# Altium PCB PCB_Design.PcbDoc
Units mil, origin at the board's own origin, x right, y up, seen from the top; angles counter-clockwise.
Board outline 2007.87 x 905.51 mil, 6 copper layers (Top Layer, Signal Layer 4, Signal Layer 3, Signal Layer 1, Signal Layer 2, Bottom Layer), stack 20.356 mil thick; 143 components, 153 nets, 827 pads, 0 vias.
Unrouted connection lines stored in the file: 8.
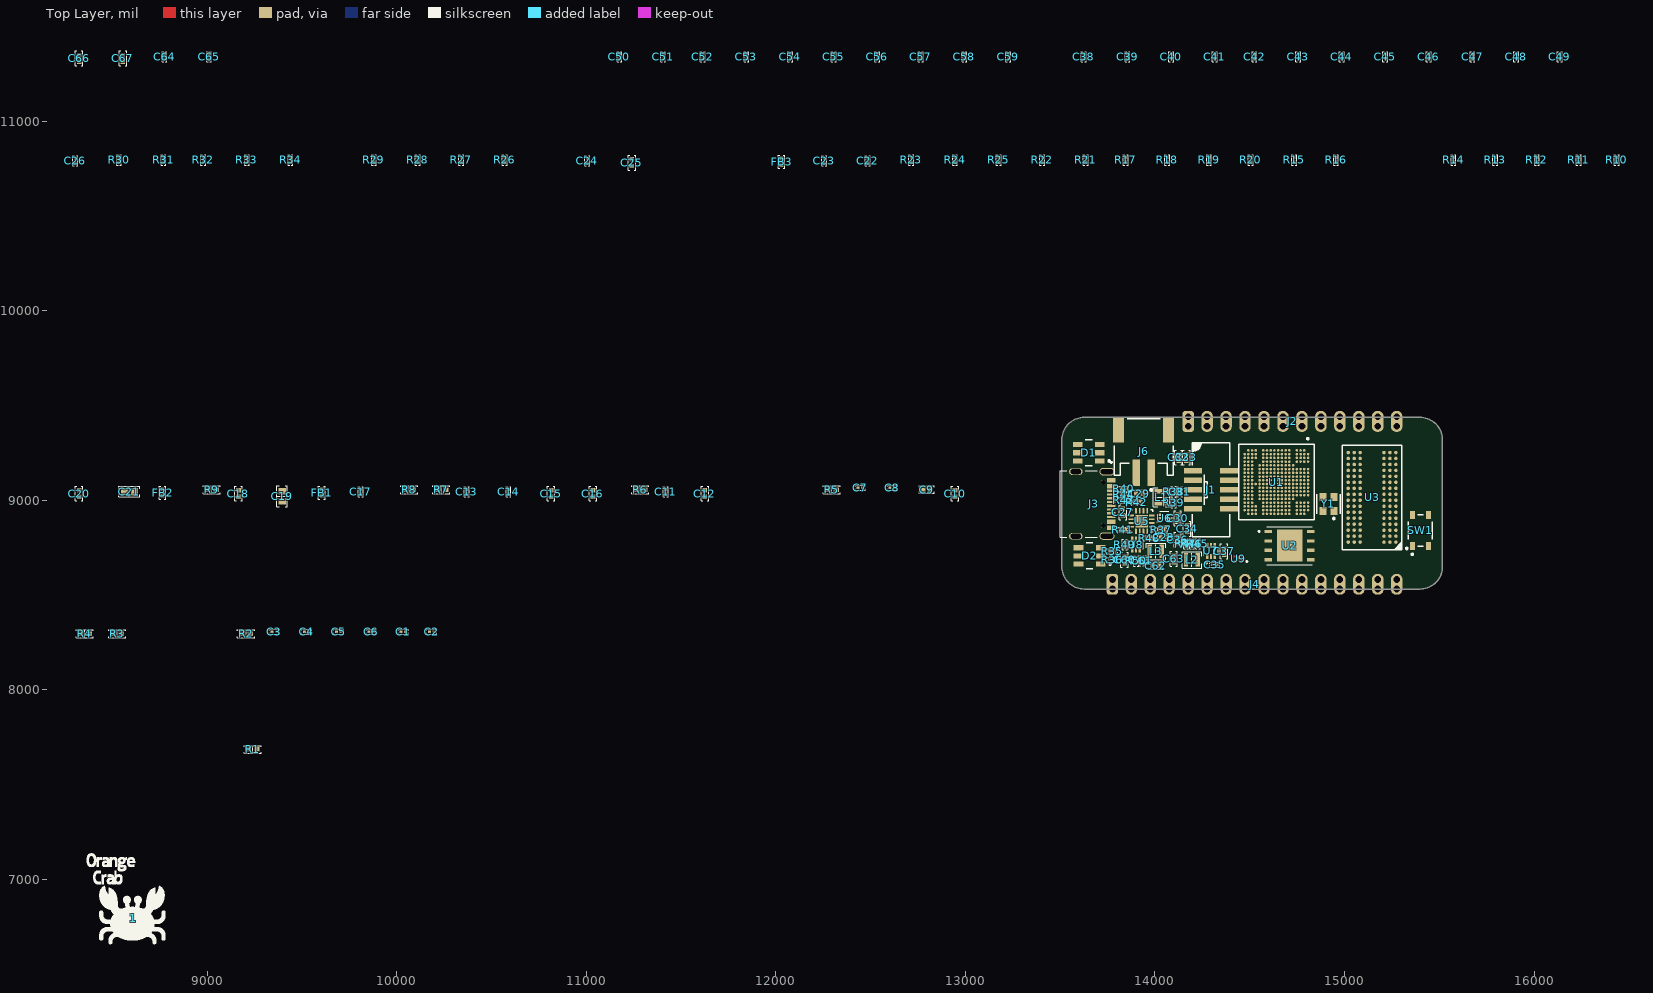
[diagram p0: Top Layer view]
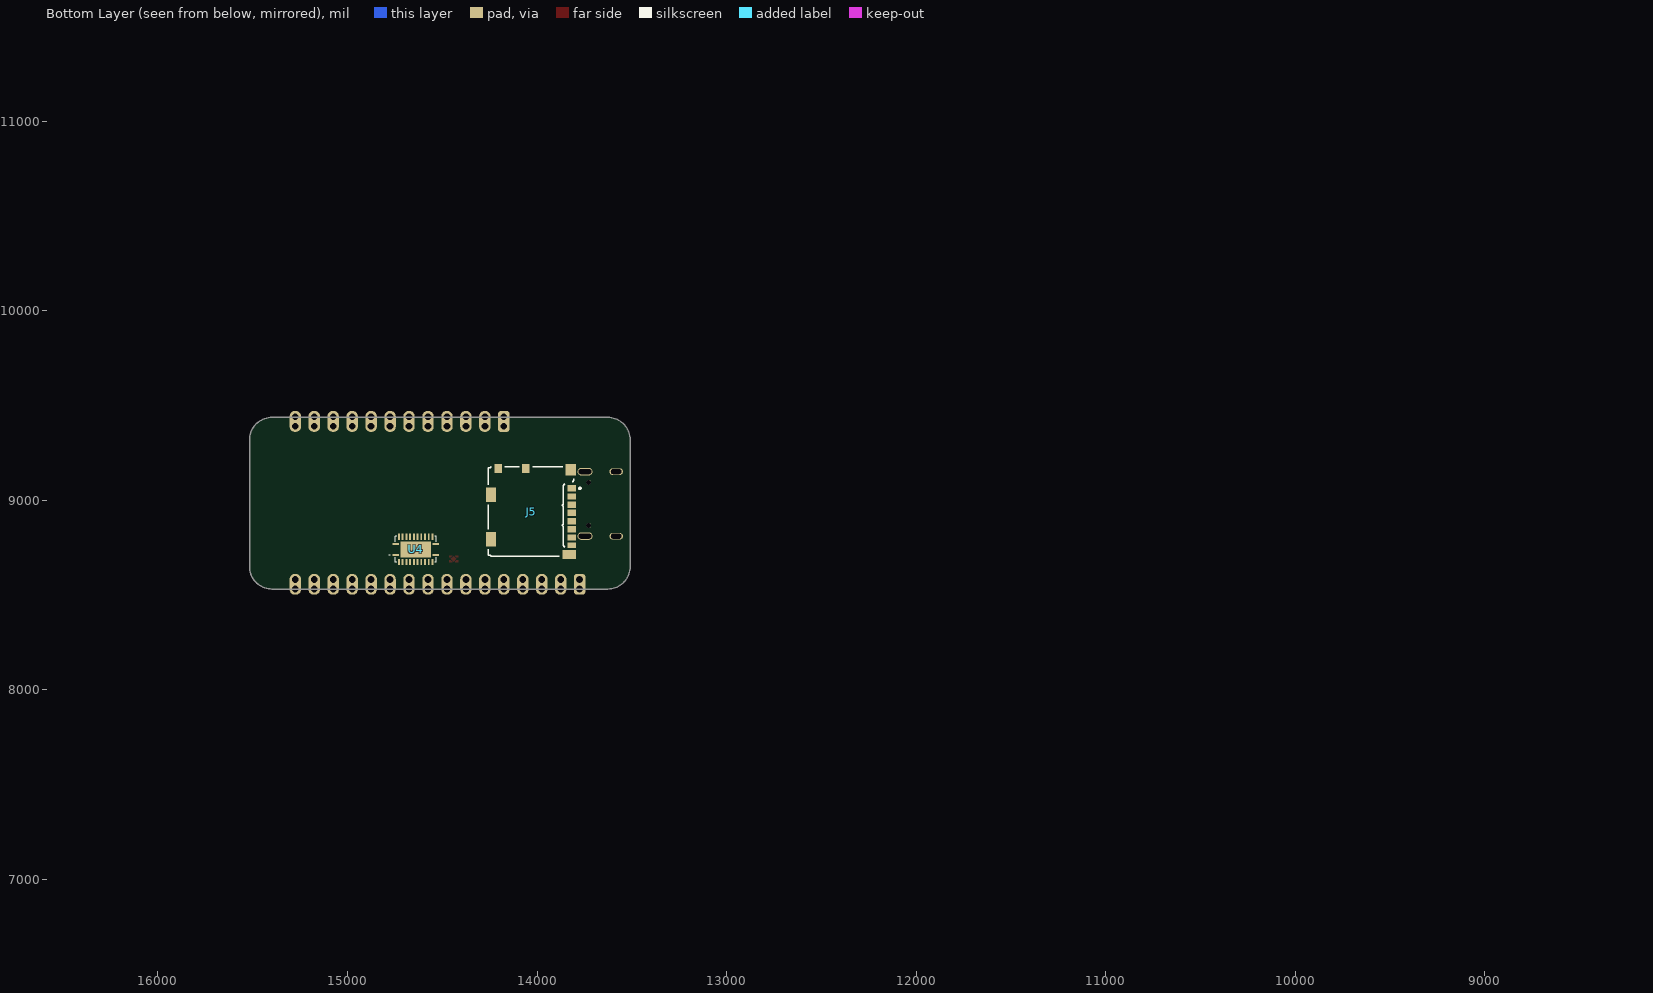
[diagram p1: Bottom Layer view, seen from below]

## Layer stack, top to bottom
Top Solder: solder mask 0.4, Solder Resist, Dk 3.5
Top Layer: signal copper 1.4
Dielectric 1: dielectric 0.472, Dk 3.4
Signal Layer 4: signal copper 1.417
Dielectric 6: dielectric 0.472, Dk 3.4
Signal Layer 3: signal copper 1.417
Dielectric 3: core 10, Dk 4.2
Signal Layer 1: signal copper 1.417
Dielectric 4: dielectric 0.472, FR-4, Dk 3.4
Signal Layer 2: signal copper 1.417
Dielectric 5: dielectric 0.472, Dk 3.4
Bottom Layer: signal copper 1.4
Bottom Solder: solder mask 0.4, Solder Resist, Dk 3.5

## Board outline
13626.57,8530.94 cw(c13626.57,8649.06) 13508.46,8649.06 13508.46,9318.35 cw(c13626.57,9318.35) 13626.57,9436.46 15398.23,9436.46 cw(c15398.23,9318.35) 15516.34,9318.35 15516.34,8649.06 cw(c15398.23,8649.06) 15398.23,8530.94

## Design rules (kind name [scope] priority, off if disabled: settings)
Clearance [All] p1: gap=4
DiffPairsRouting [All] p1: maxlimit=10 minlimit=6 mostfreqgap=8 toplayer_minwidth=6 toplayer_maxwidth=16 toplayer_prefwidth=10 midlayer1_minwidth=6 midlayer1_maxwidth=16 midlayer1_prefwidth=10 midlayer2_minwidth=6 midlayer2_maxwidth=16 midlayer2_prefwidth=10 midlayer3_minwidth=6 midlayer3_maxwidth=16 midlayer3_prefwidth=10 midlayer4_minwidth=6 midlayer4_maxwidth=16 midlayer4_prefwidth=10 bottomlayer_minwidth=6 bottomlayer_maxwidth=16 bottomlayer_prefwidth=10 maxuncoupledlength=500
MinimumSolderMaskSliver [All] p1: minsoldermaskwidth=4
PolygonConnect [All] p1: connectstyle=Relief reliefconductorwidth=10 reliefentries=4 polygonreliefangle="90 Angle" airgapwidth=10
RoomDefinition 00-Hierarchy [InComponentClass('00-Hierarchy')] p1: confinementstyle=ConfineIn formatcopy=TRUE lockcomponents=FALSE outline 8295,6655 8790,6655 8790,7145 8295,7145
RoutingVias [All] p1: holewidth=28 width=50 viastyle="Through Hole" minholewidth=28 minwidth=50 maxholewidth=28 maxwidth=50
SolderMaskExpansion [All] p1: expansion=4
Width [All] p1: maxlimit=16 minlimit=6 preferedwidth=10
28 further rules are at their usual default settings.

## Classes and differential pairs
component class 05-Power_Sources: C27 C28 C29 C30 C31 C32 C33 C34 C35 C36 C37 C38 C39 C40 C41 C42 C43 C44 C45 C46 C47 C48 C49 C50 C51 C52 C53 C54 C55 C56 C57 C58 C59 C60 C61 C62 C63 C64 C65 C66 C67 D2 J6 L1 L2 L3 R35 R36 R37 R38 R39 R40 R41 R42 R43 R44 R45 R46 R47 R48 R49 R50 U5 U6 U7 U8 U9
component class 04-External_Connectors: C22 C23 C24 C25 C26 D1 FB3 J2 J3 J4 J5 R10 R11 R12 R13 R14 R15 R16 R17 R18 R19 R20 R21 R22 R23 R24 R25 R26 R27 R28 R29 R30 R31 R32 R33 R34 SW1 U4
component class 02-FPGA_Banks: C1 C2 C3 C4 C5 C6 R2 R3 R4 U1
component class 03-DRAM_Memory: C7 C8 C9 C10 C11 C12 C13 C14 C15 C16 C17 C18 C19 C20 C21 FB1 FB2 R5 R6 R7 R8 R9 U3
component class 00-Hierarchy: 1
component class 01-FPGA_Sources: J1 R1 U2 Y1
differential pair USB_D: +USB_D_P -USB_D_N
differential pair RAM_UDQS: +RAM_UDQS_P -RAM_UDQS_N
differential pair RAM_LDQS: +RAM_LDQS_P -RAM_LDQS_N
differential pair RAM_CK: +RAM_CK_P -RAM_CK_N
differential pair EXT_PLL: +EXT_PLL_P -EXT_PLL_N

## Components (designator, comment, footprint, x,y, rotation, side; value= is the part's Value field where it differs from the comment)
1 "Logo_OC" PCBComponent_1#1 8610,6795 r0 top
C1 "10nF" "CAP 0201_0603" 10035,8305 r0 top
C2 "100nF" "CAP 0201_0603" 10185,8305 r0 top
C3 "10nF" "CAP 0201_0603" 9355,8305 r0 top
C4 "100nF" "CAP 0201_0603" 9525,8305 r0 top
C5 "10nF" "CAP 0201_0603" 9695,8305 r0 top
C6 "100nF" "CAP 0201_0603" 9865,8305 r0 top
C7 "100nF" "CAP 0201_0603" 12445,9065 r0 top
C8 "100nF" "CAP 0201_0603" 12615,9065 r0 top
C9 "1 µF" "CAP 0402_1005" 12795,9055 r0 top
C10 "1 µF" "CAP 0402_1005" 12945,9035 r90 top
C11 "100nF" "CAP 0201_0603" 11420,9045 r90 top
C12 "1 µF" "CAP 0402_1005" 11625,9035 r90 top
C13 "100nF" "CAP 0201_0603" 10370,9045 r90 top
C14 "100nF" "CAP 0201_0603" 10590,9045 r90 top
C15 "1 µF" "CAP 0402_1005" 10815,9035 r90 top
C16 "1 µF" "CAP 0402_1005" 11035,9035 r90 top
C17 "100nF" "CAP 0201_0603" 9810,9045 r90 top
C18 "1 µF" "CAP 0402_1005" 9165,9035 r90 top
C19 "22 µF" "CAP 0603_1608" 9395,9020 r90 top
C20 "1 µF" "CAP 0402_1005" 8325,9035 r90 top
C21 "22 µF" "CAP 0603_1608" 8590,9045 r0 top
C22 "100nF" "CAP 0201_0603" 12485,10790 r90 top
C23 "100nF" "CAP 0201_0603" 12255,10790 r90 top
C24 "100nF" "CAP 0201_0603" 11005,10790 r90 top
C25 "10 µF" "CAP 0402_1005" 11240,10780 r90 top
C26 "10nF" "CAP 0201_0603" 8305,10790 r90 top
C27 "4.7 µF" "CAP 0402_1005" 13830,8936.26 r270 top
C28 "4.7 µF" "CAP 0402_1005" 14045,8805 r0 top
C29 "4.7 µF" "CAP 0402_1005" 13917.8,9035 r0 top
C30 "10 µF" "CAP 0402_1005" 14120,8905 r90 top
C31 "10 pF" "CAP 0201_0603" 14130,9045 r90 top
C32 "10 µF" "CAP 0402_1005" 14125,9225 r90 top
C33 "10 µF" "CAP 0402_1005" 14165,9225 r90 top
C34 "10 µF" "CAP 0402_1005" 14170,8850 r90 top
C35 "10 pF" "CAP 0201_0603" 14315,8660 r180 top
C36 "10 µF" "CAP 0402_1005" 14120,8790 r270 top
C37 "10 µF" "CAP 0402_1005" 14365,8730 r270 top
C38 "10nF" "CAP 0201_0603" 13625,11340 r90 top
C39 "100nF" "CAP 0201_0603" 13855,11340 r90 top
C40 "10nF" "CAP 0201_0603" 14085,11340 r90 top
C41 "100nF" "CAP 0201_0603" 14315,11340 r90 top
C42 "10nF" "CAP 0201_0603" 14525,11340 r90 top
C43 "100nF" "CAP 0201_0603" 14755,11340 r90 top
C44 "10nF" "CAP 0201_0603" 14985,11340 r90 top
C45 "100nF" "CAP 0201_0603" 15215,11340 r90 top
C46 "10nF" "CAP 0201_0603" 15445,11340 r90 top
C47 "100nF" "CAP 0201_0603" 15675,11340 r90 top
C48 "10nF" "CAP 0201_0603" 15905,11340 r90 top
C49 "100nF" "CAP 0201_0603" 16135,11340 r90 top
C50 "10nF" "CAP 0201_0603" 11175,11340 r90 top
C51 "100nF" "CAP 0201_0603" 11405,11340 r90 top
C52 "10nF" "CAP 0201_0603" 11615,11340 r90 top
C53 "100nF" "CAP 0201_0603" 11845,11340 r90 top
C54 "10nF" "CAP 0201_0603" 12075,11340 r90 top
C55 "100nF" "CAP 0201_0603" 12305,11340 r90 top
C56 "10nF" "CAP 0201_0603" 12535,11340 r90 top
C57 "100nF" "CAP 0201_0603" 12765,11340 r90 top
C58 "10nF" "CAP 0201_0603" 12995,11340 r90 top
C59 "100nF" "CAP 0201_0603" 13225,11340 r90 top
C60 "10 µF" "CAP 0402_1005" 13840,8685 r90 top
C61 "10 pF" "CAP 0201_0603" 13930,8680 r90 top
C62 "10 µF" "CAP 0402_1005" 14005,8655 r180 top
C63 "10 µF" "CAP 0402_1005" 14098.94,8690 r90 top
C64 "10nF" "CAP 0201_0603" 8775,11340 r90 top
C65 "100nF" "CAP 0201_0603" 9010,11340 r90 top
C66 "4.7 µF" "CAP 0402_1005" 8325,11330 r90 top
C67 "4.7 µF" "CAP 0402_1005" 8555,11330 r90 top
D1 "LRTB_R48G" LRTB_R48G 13650,9250 r180 top
D2 "LRTB_R48G" LRTB_R48G 13655,8705.75 r180 top
FB1 "600R" "IND 0402_1005 RF WW" 9605,9040 r90 top
FB2 "600R" "IND 0402_1005 RF WW" 8765,9040 r90 top
FB3 "600R" "IND 0402_1005 RF WW" 12030,10785 r90 top
J1 "3221-10-0300-00" "CNC TECH 3221-10-0300-00" 14295,9055 r0 top
J2 "Conn_12_Male" Conn_12_Male 14175,9390 r90 top
J3 "CSP-USC16-TR" VALCON_CSP-USC16-TR 13770,8980 r270 top
J4 "Conn_16_Male" CONN_16_MALE 13775,8530.94 r90 top
J5 "MicroSD-MLX" MOLEX-MicroSd 14030,8940 r90 bottom
J6 "S2B-PH-SM4" JST-S2B-PH-SM4-TB(LF)(SN)-2_V 13940,9280 r180 top
L1 "2.2µH" "IND 0806_2016" 14033.27,9015 r90 top
L2 "2.2µH" "IND 0806_2016" 14195,8685 r180 top
L3 "2.2µH" "IND 0806_2016" 14005,8730 r0 top
R1 "1k" "RES 0402_1005" 9240,7685 r0 top
R2 "1.5k" "RES 0402_1005" 9205,8295 r0 top
R3 "4.7k" "RES 0402_1005" 8525,8295 r0 top
R4 "4.7k" "RES 0402_1005" 8355,8295 r0 top
R5 "1k" "RES 0402_1005" 12295,9055 r0 top
R6 "1k" "RES 0402_1005" 11285,9055 r0 top
R7 "51R" "RES 0402_1005" 10235,9055 r0 top
R8 "51R" "RES 0402_1005" 10065,9055 r0 top
R9 "240R" "RES 0402_1005" 9025,9055 r0 top
R10 "10k" "RES 0201_0603" 16435,10795 r90 top
R11 "1.5k" "RES 0201_0603" 16235,10795 r90 top
R12 "20R" "RES 0201_0603" 16015,10795 r90 top
R13 "10k" "RES 0201_0603" 15795,10795 r90 top
R14 "20R" "RES 0201_0603" 15575,10795 r90 top
R15 "5.1k" "RES 0201_0603" 14735,10795 r90 top
R16 "5.1k" "RES 0201_0603" 14955,10795 r90 top
R17 "10k" "RES 0201_0603" 13845,10795 r90 top
R18 "51R" "RES 0201_0603" 14065,10795 r90 top
R19 "51R" "RES 0201_0603" 14285,10795 r90 top
R20 "51R" "RES 0201_0603" 14505,10795 r90 top
R21 "10k" "RES 0201_0603" 13635,10795 r90 top
R22 "5.1k" "RES 0201_0603" 13405,10795 r90 top
R23 "51R" "RES 0201_0603" 12715,10795 r90 top
R24 "51R" "RES 0201_0603" 12945,10795 r90 top
R25 "51R" "RES 0201_0603" 13175,10795 r90 top
R26 "1.5k" "RES 0201_0603" 10570,10795 r90 top
R27 "4.7k" "RES 0201_0603" 10340,10795 r90 top
R28 "4.7k" "RES 0201_0603" 10110,10795 r90 top
R29 "3.57k" "RES 0201_0603" 9880,10795 r90 top
R30 "10k" "RES 0201_0603" 8535,10795 r90 top
R31 "10k" "RES 0201_0603" 8770,10795 r90 top
R32 "10k" "RES 0201_0603" 8980,10795 r90 top
R33 "10k" "RES 0201_0603" 9210,10795 r90 top
R34 "10k" "RES 0201_0603" 9440,10795 r90 top
R35 "4.7k" "RES 0201_0603" 13775,8730 r0 top
R36 "10k" "RES 0201_0603" 13775,8685 r0 top
R37 "10k" "RES 0201_0603" 14033.27,8845 r180 top
R38 "100k" "RES 0201_0603" 14098.94,9044.41 r90 top
R39 "120k" "RES 0201_0603" 14098.94,8986.46 r90 top
R40 "10k" "RES 0201_0603" 13835,9060 r180 top
R41 "3.09k" "RES 0201_0603" 13830,8845 r0 top
R42 "3.57k" "RES 0201_0603" 13905,8990 r180 top
R43 "4.32k" "RES 0201_0603" 13835,8999.25 r180 top
R44 "56.2k" "RES 0201_0603" 13835,9029.21 r180 top
R45 "DNP" "RES 0201_0603" 14226.5,8770 r270 top
R46 "150k" "RES 0201_0603" 14195,8770 r270 top
R47 "120k" "RES 0201_0603" 14163.5,8770 r90 top
R48 "DNP" "RES 0201_0603" 13970,8800 r180 top
R49 "360k" "RES 0201_0603" 13840,8765 r90 top
R50 "82k" "RES 0201_0603" 13900.63,8679.37 r90 top
SW1 "PTS810" PCBComponent_1#2 15400,8840 r90 top
U1 "LFE5U-25F-8MG285C" FP-cBGA-LFE5U 14640,9095 r270 top
U2 "W25Q128JVP" SON127P500X600X80-9N 14710,8760 r0 top
U3 "MT41K64M16TW" MICT-TW-96 15145,9015 r180 top
U4 "74HC4067BQ" QFN50P550X350X100-25N410X210 14640,8740 r90 bottom
U5 "BQ24232RGTR" FP-RGTR_MFG 13929.06,8889.41 r0 top
U6 "TLV62569DRL" SOT50P160X60-6N 14050,8904.06 r180 top
U7 "TLV62569DRL" SOT50P160X60-6N 14295.32,8731.73 r90 top
U8 "TLV62569DRL" SOT50P160X60-6N 13899.53,8765 r90 top
U9 "NCP115CMX120TCG" VREG_NCP115CMX120TCG 14440,8690 r180 top
Y1 "KC2520B48" FP-KC2520B-MFG 14915,8980 r90 top

## Footprints (in the part's own frame and the unit in brackets; to place one, negate y for a bottom-side part, rotate by r counter-clockwise, add the part's x,y. Pads: shape width x height; smd on the part's side, far side on the other; paste and mask are expansions set on the pad)
"CAP 0201_0603" [mm] "Chip Capacitor, 2-Leads, Body 0.60x0.30mm, IPC Medium Density"
  rect 0.4x0.35 smd: 1(-0.31,0) 2(0.31,0)
  silkscreen extent -0.67,-0.33 0.67,0.33, body extent -0.3,-0.15 0.3,0.15, height 0.3
"CAP 0402_1005" [mm] "Chip Capacitor, 2-Leads, Body 1.02x0.51mm, IPC Medium Density"
  rect 0.6x0.64 smd: 1(-0.44,0) 2(0.44,0)
  silkscreen extent -1,-0.5 1,0.5, body extent -0.5,-0.26 0.5,0.26, height 0.52
"CAP 0603_1608" [mm] "Chip Capacitor, 2-Leads, Body 1.60x0.80mm, IPC Medium Density"
  rect 0.9x1 smd: 1(-0.675,0) 2(0.675,0)
  silkscreen extent -1.4,-0.7 1.4,0.7, body extent -0.8,-0.41 0.8,0.41, height 0.82
"CNC TECH 3221-10-0300-00" [mm]
  rect 2.4x0.76 smd: 1(-2.4,2.54) 2(-2.4,1.27) 3(-2.4,0) 4(-2.4,-1.27) 5(-2.4,-2.54) 6(2.4,-2.54) 7(2.4,-1.27) 8(2.4,0) 9(2.4,1.27) 10(2.4,2.54)
  silkscreen extent -2.5,-6.3 2.5,6.3, body extent -2.75,-6.32 2.75,6.33, height 5.6
Conn_12_Male [mil]
  rrect50% 110x60 hole 36 copper offset 25,0: 1(0,0)
  rrect100% 36x36 hole 36: 1(50,0) 2(50,-100) 3(50,-200) 4(50,-300) 5(50,-400) 6(50,-500) 7(50,-600) 8(50,-700) 9(50,-800) 10(50,-900) 11(50,-1000) 12(50,-1100)
  rrect90% 110x60 hole 36 copper offset 25,0: 2(0,-100) 3(0,-200) 4(0,-300) 5(0,-400) 6(0,-500) 7(0,-600) 8(0,-700) 9(0,-800) 10(0,-900) 11(0,-1000) 12(0,-1100)
CONN_16_MALE [mil]
  rrect50% 110x60 hole 36 copper offset 25,0: 1(0,0)
  rrect100% 36x36 hole 36: 1(50,0) 2(50,-100) 3(50,-200) 4(50,-300) 5(50,-400) 6(50,-500) 7(50,-600) 8(50,-700) 9(50,-800) 10(50,-900) 11(50,-1000) 12(50,-1100) 13(50,-1200) 14(50,-1300) 15(50,-1400) 16(50,-1500)
  rrect90% 110x60 hole 36 copper offset 25,0: 2(0,-100) 3(0,-200) 4(0,-300) 5(0,-400) 6(0,-500) 7(0,-600) 8(0,-700) 9(0,-800) 10(0,-900) 11(0,-1000) 12(0,-1100) 13(0,-1200) 14(0,-1300) 15(0,-1400) 16(0,-1500)
FP-cBGA-LFE5U [mm]
  round 0.34 smd paste+0 mask+0: A2(-3.75,4.25) A3(-3.25,4.25) A4(-2.75,4.25) A6(-1.75,4.25) A7(-1.25,4.25) A8(-0.75,4.25) A9(-0.25,4.25) A10(0.25,4.25) A11(0.75,4.25) A12(1.25,4.25) A13(1.75,4.25) A15(2.75,4.25) A16(3.25,4.25) A17(3.75,4.25) B1(-4.25,3.75) B2(-3.75,3.75) B3(-3.25,3.75) B4(-2.75,3.75) B6(-1.75,3.75) B7(-1.25,3.75) B8(-0.75,3.75) B9(-0.25,3.75) B10(0.25,3.75) B11(0.75,3.75) B12(1.25,3.75) B13(1.75,3.75) B15(2.75,3.75) B16(3.25,3.75) B17(3.75,3.75) B18(4.25,3.75) C1(-4.25,3.25) C2(-3.75,3.25) C3(-3.25,3.25) C4(-2.75,3.25) C6(-1.75,3.25) C7(-1.25,3.25) C8(-0.75,3.25) C9(-0.25,3.25) C10(0.25,3.25) C11(0.75,3.25) C12(1.25,3.25) C13(1.75,3.25) C15(2.75,3.25) C16(3.25,3.25) C17(3.75,3.25) C18(4.25,3.25) D1(-4.25,2.75) D2(-3.75,2.75) D3(-3.25,2.75) D4(-2.75,2.75) D6(-1.75,2.75) D7(-1.25,2.75) D8(-0.75,2.75) D9(-0.25,2.75) D10(0.25,2.75) D11(0.75,2.75) D12(1.25,2.75) D13(1.75,2.75) D15(2.75,2.75) D16(3.25,2.75) D17(3.75,2.75) D18(4.25,2.75) E5(-2.25,2.25) E6(-1.75,2.25) E7(-1.25,2.25) E8(-0.75,2.25) E9(-0.25,2.25) E10(0.25,2.25) E11(0.75,2.25) E12(1.25,2.25) E13(1.75,2.25) E14(2.25,2.25) F1(-4.25,1.75) F2(-3.75,1.75) F3(-3.25,1.75) F4(-2.75,1.75) F5(-2.25,1.75) F6(-1.75,1.75) F7(-1.25,1.75) F8(-0.75,1.75) F9(-0.25,1.75) F10(0.25,1.75) F11(0.75,1.75) F12(1.25,1.75) F13(1.75,1.75) F14(2.25,1.75) F15(2.75,1.75) F16(3.25,1.75) F17(3.75,1.75) F18(4.25,1.75) G1(-4.25,1.25) G2(-3.75,1.25) G3(-3.25,1.25) G4(-2.75,1.25) G5(-2.25,1.25) G6(-1.75,1.25) G7(-1.25,1.25) G8(-0.75,1.25) G9(-0.25,1.25) G10(0.25,1.25) G11(0.75,1.25) G12(1.25,1.25) G13(1.75,1.25) G14(2.25,1.25) G15(2.75,1.25) G16(3.25,1.25) G17(3.75,1.25) G18(4.25,1.25) H1(-4.25,0.75) H2(-3.75,0.75) H3(-3.25,0.75) H4(-2.75,0.75) H5(-2.25,0.75) H6(-1.75,0.75) H7(-1.25,0.75) H8(-0.75,0.75) H9(-0.25,0.75) H10(0.25,0.75) H11(0.75,0.75) H12(1.25,0.75) H13(1.75,0.75) H14(2.25,0.75) H15(2.75,0.75) H16(3.25,0.75) H17(3.75,0.75) H18(4.25,0.75) J1(-4.25,0.25) J2(-3.75,0.25) J3(-3.25,0.25) J4(-2.75,0.25) J5(-2.25,0.25) J6(-1.75,0.25) J7(-1.25,0.25) J8(-0.75,0.25) J9(-0.25,0.25) J10(0.25,0.25) J11(0.75,0.25) J12(1.25,0.25) J13(1.75,0.25) J14(2.25,0.25) J15(2.75,0.25) J16(3.25,0.25) J17(3.75,0.25) J18(4.25,0.25) K1(-4.25,-0.25) K2(-3.75,-0.25) K3(-3.25,-0.25) K4(-2.75,-0.25) K5(-2.25,-0.25) K6(-1.75,-0.25) K7(-1.25,-0.25) K8(-0.75,-0.25) K9(-0.25,-0.25) K10(0.25,-0.25) K11(0.75,-0.25) K12(1.25,-0.25) K13(1.75,-0.25) K14(2.25,-0.25) K15(2.75,-0.25) K16(3.25,-0.25) K17(3.75,-0.25) K18(4.25,-0.25) L1(-4.25,-0.75) L2(-3.75,-0.75) L3(-3.25,-0.75) L4(-2.75,-0.75) L5(-2.25,-0.75) L6(-1.75,-0.75) L7(-1.25,-0.75) L8(-0.75,-0.75) L9(-0.25,-0.75) L10(0.25,-0.75) L11(0.75,-0.75) L12(1.25,-0.75) L13(1.75,-0.75) L14(2.25,-0.75) L15(2.75,-0.75) L16(3.25,-0.75) L17(3.75,-0.75) L18(4.25,-0.75) M1(-4.25,-1.25) M2(-3.75,-1.25) M3(-3.25,-1.25) M4(-2.75,-1.25) M5(-2.25,-1.25) M6(-1.75,-1.25) M7(-1.25,-1.25) M8(-0.75,-1.25) M9(-0.25,-1.25) M10(0.25,-1.25) M11(0.75,-1.25) M12(1.25,-1.25) M13(1.75,-1.25) M14(2.25,-1.25) M15(2.75,-1.25) M16(3.25,-1.25) M17(3.75,-1.25) M18(4.25,-1.25) N1(-4.25,-1.75) N2(-3.75,-1.75) N3(-3.25,-1.75) N4(-2.75,-1.75) N5(-2.25,-1.75) N6(-1.75,-1.75) N7(-1.25,-1.75) N8(-0.75,-1.75) N9(-0.25,-1.75) N10(0.25,-1.75) N11(0.75,-1.75) N12(1.25,-1.75) N13(1.75,-1.75) N14(2.25,-1.75) N15(2.75,-1.75) N16(3.25,-1.75) N17(3.75,-1.75) N18(4.25,-1.75) P5(-2.25,-2.25) P6(-1.75,-2.25) P7(-1.25,-2.25) P8(-0.75,-2.25) P9(-0.25,-2.25) P10(0.25,-2.25) P11(0.75,-2.25) P12(1.25,-2.25) P13(1.75,-2.25) P14(2.25,-2.25) R1(-4.25,-2.75) R2(-3.75,-2.75) R3(-3.25,-2.75) R10(0.25,-2.75) R16(3.25,-2.75) R17(3.75,-2.75) R18(4.25,-2.75) T1(-4.25,-3.25) T2(-3.75,-3.25) T3(-3.25,-3.25) T4(-2.75,-3.25) T5(-2.25,-3.25) T6(-1.75,-3.25) T7(-1.25,-3.25) T8(-0.75,-3.25) T9(-0.25,-3.25) T10(0.25,-3.25) T11(0.75,-3.25) T12(1.25,-3.25) T13(1.75,-3.25) T14(2.25,-3.25) T15(2.75,-3.25) T16(3.25,-3.25) T17(3.75,-3.25) T18(4.25,-3.25) U1(-4.25,-3.75) U2(-3.75,-3.75) U3(-3.25,-3.75) U4(-2.75,-3.75) U5(-2.25,-3.75) U6(-1.75,-3.75) U7(-1.25,-3.75) U8(-0.75,-3.75) U9(-0.25,-3.75) U10(0.25,-3.75) U11(0.75,-3.75) U12(1.25,-3.75) U13(1.75,-3.75) U14(2.25,-3.75) U15(2.75,-3.75) U16(3.25,-3.75) U17(3.75,-3.75) U18(4.25,-3.75) V2(-3.75,-4.25) V3(-3.25,-4.25) V4(-2.75,-4.25) V5(-2.25,-4.25) V6(-1.75,-4.25) V7(-1.25,-4.25) V8(-0.75,-4.25) V9(-0.25,-4.25) V10(0.25,-4.25) V11(0.75,-4.25) V12(1.25,-4.25) V13(1.75,-4.25) V14(2.25,-4.25) V15(2.75,-4.25) V16(3.25,-4.25) V17(3.75,-4.25)
  silkscreen extent -5.95,-5.05 5.05,5.05, body extent -5.55,-5.55 5.55,5.55, height 0.25
FP-KC2520B-MFG [mm]
  rect 1.05x0.95 smd paste+0 mask+0: 1(-0.925,-0.725) 2(0.925,-0.725) 3(0.925,0.725) 4(-0.925,0.725)
  silkscreen extent -2.07,-1.58 1.3,1.58, body extent -1.55,-1.3 1.55,1.3, height 0.25
FP-RGTR_MFG [mm]
  rect 0.766x0.239 smd paste+0 mask+0: 1(-1.373,0.75)
  rrect100% 0.766x0.239 smd paste+0 mask+0: 2(-1.373,0.25) 3(-1.373,-0.25) 4(-1.373,-0.75) 9(1.373,-0.75) 10(1.373,-0.25) 11(1.373,0.25) 12(1.373,0.75)
  rrect100% 0.239x0.766 smd paste+0 mask+0: 5(-0.75,-1.373) 6(-0.25,-1.373) 7(0.25,-1.373) 8(0.75,-1.373) 13(0.75,1.373) 14(0.25,1.373) 15(-0.25,1.373) 16(-0.75,1.373)
  rect 1.68x1.68 smd paste-1000 mask+0: 17(0,0)
  silkscreen extent -2.37,-1.5 1.5,1.5, body extent -1.86,-1.86 1.86,1.86, height 0.25
"IND 0402_1005 RF WW" [mm] "Chip Inductor, 2-Leads, Body 1.00x0.50mm, IPC High Density"
  rect 0.48x0.54 smd: 1(-0.44,0) 2(0.44,0)
  silkscreen extent -0.87,-0.45 0.87,0.45, body extent -0.5,-0.29 0.5,0.29, height 0.51
"IND 0806_2016" [mm] "Chip Capacitor, 2-Leads, Body 2.00x1.20mm, IPC Medium Density"
  rect 0.6x1.8 smd: 1(-0.8,0) 2(0.8,0)
  silkscreen extent -1.3,-1.1 1.3,1.1, body extent -1.01,-0.91 1.01,0.91, height 1.81
JST-S2B-PH-SM4-TB(LF)(SN)-2_V [mm]
  rect 1x3.5 smd: 1(-1,3.45) 2(1,3.45)
  rect 1.5x3.4 smd: MP1(-3.35,-2.3) MP2(3.35,-2.3)
  silkscreen extent -3.95,-3.8 3.95,5.87, body extent -3.95,-3.8 3.95,4.8, height 5.6
LRTB_R48G [mm]
  rect 1.3x0.7 smd paste+0 mask+0: 1(-1.475,1.1) 2(-1.475,0) 3(-1.475,-1.1) 4(1.475,-1.1) 5(1.475,0) 6(1.475,1.1)
  silkscreen extent -2.88,-1.75 0.45,1.75, body extent -2.22,-1.85 2.22,1.85, height 0.25
MICT-TW-96 [mm]
  round 0.47 smd mask-0.025: A1(-3.2,6) A2(-2.4,6) A3(-1.6,6) A7(1.6,6) A8(2.4,6) A9(3.2,6) B1(-3.2,5.2) B2(-2.4,5.2) B3(-1.6,5.2) B7(1.6,5.2) B8(2.4,5.2) B9(3.2,5.2) C1(-3.2,4.4) C2(-2.4,4.4) C3(-1.6,4.4) C7(1.6,4.4) C8(2.4,4.4) C9(3.2,4.4) D1(-3.2,3.6) D2(-2.4,3.6) D3(-1.6,3.6) D7(1.6,3.6) D8(2.4,3.6) D9(3.2,3.6) E1(-3.2,2.8) E2(-2.4,2.8) E3(-1.6,2.8) E7(1.6,2.8) E8(2.4,2.8) E9(3.2,2.8) F1(-3.2,2) F2(-2.4,2) F3(-1.6,2) F7(1.6,2) F8(2.4,2) F9(3.2,2) G1(-3.2,1.2) G2(-2.4,1.2) G3(-1.6,1.2) G7(1.6,1.2) G8(2.4,1.2) G9(3.2,1.2) H1(-3.2,0.4) H2(-2.4,0.4) H3(-1.6,0.4) H7(1.6,0.4) H8(2.4,0.4) H9(3.2,0.4) J1(-3.2,-0.4) J2(-2.4,-0.4) J3(-1.6,-0.4) J7(1.6,-0.4) J8(2.4,-0.4) J9(3.2,-0.4) K1(-3.2,-1.2) K2(-2.4,-1.2) K3(-1.6,-1.2) K7(1.6,-1.2) K8(2.4,-1.2) K9(3.2,-1.2) L1(-3.2,-2) L2(-2.4,-2) L3(-1.6,-2) L7(1.6,-2) L8(2.4,-2) L9(3.2,-2) M1(-3.2,-2.8) M2(-2.4,-2.8) M3(-1.6,-2.8) M7(1.6,-2.8) M8(2.4,-2.8) M9(3.2,-2.8) N1(-3.2,-3.6) N2(-2.4,-3.6) N3(-1.6,-3.6) N7(1.6,-3.6) N8(2.4,-3.6) N9(3.2,-3.6) P1(-3.2,-4.4) P2(-2.4,-4.4) P3(-1.6,-4.4) P7(1.6,-4.4) P8(2.4,-4.4) P9(3.2,-4.4) R1(-3.2,-5.2) R2(-2.4,-5.2) R3(-1.6,-5.2) R7(1.6,-5.2) R8(2.4,-5.2) R9(3.2,-5.2) T1(-3.2,-6) T2(-2.4,-6) T3(-1.6,-6) T7(1.6,-6) T8(2.4,-6) T9(3.2,-6)
  silkscreen extent -4.78,-7 4,7, body extent -4,-7 4,7, height 1.2
MOLEX-MicroSd [mm]
  rect 0.85x1.1 smd: 1(3.113,-5.412) 2(2.013,-5.412) 3(0.913,-5.412) 4(-0.188,-5.412) 5(-1.288,-5.412) 6(-2.387,-5.412) 7(-3.487,-5.412)
  rect 0.75x1.1 smd: 8(-4.537,-5.412)
  rect 1.2x1 smd: 9(5.748,0.738) 10(5.748,4.438)
  rect 1.55x1.35 smd: 11(5.573,-5.287)
  rect 1.17x1.8 smd: 12(-5.747,-5.062)
  rect 1.9x1.35 smd: 13(-3.722,5.413) 14(2.248,5.413)
  silkscreen extent -5.97,-6.64 5.98,5.74, body extent -5.97,-5.66 5.98,5.74, height 1.45
PCBComponent_1#1 [mil]
  silkscreen extent -245,-134 170,341
PCBComponent_1#2 [mil]
  rect 41.34x25.59 smd paste+0 mask+0: 1(-81.69,42.32) 2(81.69,42.32) 3(-81.69,-42.32) 4(81.69,-42.32)
  silkscreen extent -131,-63 83,63, body extent -106,-67 106,67, height 10
QFN50P550X350X100-25N410X210 [mm]
  rect 0.26x0.86 smd: 1(-0.75,2.685) 12(-0.75,-2.685) 13(0.75,-2.685) 24(0.75,2.685)
  rect 0.86x0.26 smd: 2(-1.685,2.25) 3(-1.685,1.75) 4(-1.685,1.25) 5(-1.685,0.75) 6(-1.685,0.25) 7(-1.685,-0.25) 8(-1.685,-0.75) 9(-1.685,-1.25) 10(-1.685,-1.75) 11(-1.685,-2.25) 14(1.685,-2.25) 15(1.685,-1.75) 16(1.685,-1.25) 17(1.685,-0.75) 18(1.685,-0.25) 19(1.685,0.25) 20(1.685,0.75) 21(1.685,1.25) 22(1.685,1.75) 23(1.685,2.25)
  rect 2.1x4.1 smd paste-3 mask+0: 25(0,0)
  silkscreen extent -1.75,-2.75 1.75,3.55, body extent -1.75,-2.75 1.75,2.75, height 1.01
"RES 0201_0603" [mm] "Chip Resistor, 2-Leads, Body 0.60x0.30mm, IPC Medium Density"
  rect 0.44x0.35 smd: 1(-0.325,0) 2(0.325,0)
  silkscreen extent -0.7,-0.33 0.7,0.33, body extent -0.3,-0.15 0.3,0.15, height 0.21
"RES 0402_1005" [mm] "Chip Resistor, 2-Leads, Body 1.0x0.5mm, IPC Medium Density"
  rect 0.75x0.6 smd: 1(-0.575,0) 2(0.575,0)
  silkscreen extent -1.14,-0.51 1.14,0.51, body extent -0.5,-0.25 0.5,0.25, height 0.35
SON127P500X600X80-9N [mm]
  rrect25% 1.04x0.44 smd: 1(-2.845,1.905) 2(-2.845,0.635) 3(-2.845,-0.635) 4(-2.845,-1.905) 5(2.845,-1.905) 6(2.845,-0.635) 7(2.845,0.635) 8(2.845,1.905)
  rect 3.4x4.3 smd paste-3: 9(0,0)
  silkscreen extent -4.18,-2.55 3.05,2.55, body extent -3,-2.51 3,2.49, height 0.81
SOT50P160X60-6N [mm]
  rect 0.66x0.31 smd: 1(-0.735,0.5) 2(-0.735,0) 3(-0.735,-0.5) 4(0.735,-0.5) 5(0.735,0) 6(0.735,0.5)
  silkscreen extent -1.7,-0.97 0.6,0.97, body extent -0.8,-0.8 0.8,0.8, height 0.61
VALCON_CSP-USC16-TR [mm]
  rect 0.3x1.14 smd: A1(-3.35,0) A4(-2.55,0) A5(-1.25,0) A6(-0.25,0) A7(0.25,0) A8(1.25,0) A9(2.55,0) A12(3.35,0) B1(3.05,0) B4(2.25,0) B5(1.75,0) B6(0.75,0) B7(-0.75,0) B8(-1.75,0) B9(-2.25,0) B12(-3.05,0)
  oval 1x2 hole 0.65 slot 1.72 at 90 deg: S1(-4.325,-0.59) S2(4.311,-0.59)
  oval 0.9x1.8 hole 0.65 slot 1.4 at 90 deg: S3(-4.325,-4.77) S4(4.325,-4.77)
  round 0.65 hole 0.65 unplated: ""(-2.89,-1.07) ""(2.89,-1.07)
  silkscreen extent -5.67,-6.86 4.47,0.1, body extent -4.47,-7.42 4.47,0.33, height 3.26
VREG_NCP115CMX120TCG [mm]
  rect 0.1x0.1 smd paste-1 mask+0: 1(-0.405,0.325) 2(-0.405,-0.325) 3(0.405,-0.325) 4(0.405,0.325)
  rect 0.2x0.2 smd paste-1 mask+0: 5(0,0)
  Top Layer region: 0.368,0 0,-0.368 -0.368,0 0,0.368
  Top Layer region: -0.21,0.345 -0.36,0.195 -0.6,0.195 -0.6,0.455 -0.21,0.455
  Top Layer region: -0.21,-0.345 -0.21,-0.455 -0.6,-0.455 -0.6,-0.195 -0.36,-0.195
  Top Layer region: 0.6,-0.455 0.21,-0.455 0.21,-0.345 0.36,-0.195 0.6,-0.195
  Top Layer region: 0.6,0.195 0.36,0.195 0.21,0.345 0.21,0.455 0.6,0.455
  silkscreen extent -1.22,0.25 -1.02,0.45, body extent -0.5,-0.5 0.5,0.5, height 0.8

## Part data
C1 C3 C5 C26 C38 C40 C42 C44 C46 C48 C50 C52 C54 C56 C58 C64: library part 0201ZC103JAT2A, "CAP CER 10000PF 10V X7R 0201"
C2 C4 C6 C7 C8 C11 C13 C14 C17 C22 C23 C24 C39 C41 C43 C45 C47 C49 C51 C53 C55 C57 C59 C65: library part GRT033C80J104KE01J, "CAP CER 0.1UF 6.3V X6S 0201"
C9 C10 C12 C15 C16 C18 C20: library part LMK105C6105KV-F, "CAP CER 1UF 10V X6S 0402"
C19 C21: library part GRM186R60J226ME15D, "CAP CER 22UF 6.3V X5R 0603"
C25 C30 C32 C33 C34 C36 C37 C60 C62 C63: library part CL05A106MP8NUB8, "CAP CER 10UF 10V X5R 0402"
C27 C28 C29 C66 C67: library part C1005X6S0G475M050BC, "CAP CER 4.7UF 4V X6S 0402"
C31 C35 C61: library part C0201C100J3GAC7867, "CAP CER 10PF 25V C0G/NP0 0201"
D1 D2: "RGB LED LRTB R48G"
FB1 FB2 FB3: library part LQW15AN4N8D8ZD, "FIXED IND 4.8NH 1.2A 71MOHM SMD"
J1: "CONN HEADER SMD 10POS 1.27MM"
J2: "Conn_01x12_Male"
J3: "CSP-USC16-TR Valcon USB Type C Surface Mount PCB Socket"
J4: "Conn_01x16_Male"
J5: "Micro SD Card, RA, -25 to 85 degC, 8-Pin SMD, RoHS"
J6: "Male Header, Pitch 2 mm, 1 x 2 Position, Height 5.5 mm"
L1 L2 L3: library part ASMPM-0806-2R2M-T, "FIXED IND 2.2UH 1.4A 168MOHM"
R1 R2 R3 R4 R5 R6 R7 R8 R9: library part ERJ-2RKF1240X, "RES SMD 124 OHM 1% 1/10W 0402"
R10 R11 R12 R13 R14 R15 R16 R17 R18 R19 R20 R21 R22 R23 R24 R25 R26 R27 R28 R29 R30 R31 R32 R33 R34 R35 R36 R37 R40 R41 R42 R43 R44 R45 R48: library part ERA-1AEB103C, "RES SMD 10K OHM 0.1% 1/20W 0201"
R38 R39 R46 R47 R49 R50: library part PFR03S-104-JNH, "RES SMD 100K OHM 5% 1/20W 0201"
U1: "FPGA LatticeECP5 Family 24000 Cells 40nm Technology 1.1V 285-Pin CSFBGA"
U2: "FLASH - NOR Memory IC 128Mb (16M x 8) SPI - Quad I/O, QPI, DTR 133 MHz 8-WSON (6x5)"
U3: "DDR3L SDRAM, 8 Meg x 16 x 8 Bank, 1.07 ns, 0 to 95 degC, 96-Ball FBGA (TW), Pb-Free"
U4: "1 Circuit IC Switch 16:1 120Ohm 24-DHVQFN _5.5x3.5_"
U5: "IC LI-ION CHARGE PWR MGMT 16QFN BQ24232RGTR"
U6 U7 U8: "2.5V-5.5V input, 2-A high efficiency step-down buck converter in SOT23 and SOT563 package"
U9: "Linear Voltage Regulator IC Positive Fixed 1 Output 300mA 4-XDFN (1x1)"

## Nets (pads, with @x,y where several pads share a name; then routed paths per layer and width w, separated by ;. In a path a pad name is that pad's centre, name@x,y a point inside that pad or via, vN(x,y) a via of type N, cw(c..) or ccw(c..) an arc to the next point about the centre after c; other vN are vias at no path point)
_USB_D+: J3.A6 J3.B6 R12.2
_USB_D-: J3.A7 J3.B7 R14.2
A0: R18.2 U4.8
A1: R23.2 U4.7
A2: R19.2 U4.6
A3: R24.2 U4.5
A4: R20.2 U4.4
A5: R25.2 U4.3
ADC_CTRL0: R22.1 U1.G1
ADC_CTRL1: U1.F1 U4.15
ADC_MUX0: U1.F4
ADC_MUX1: U1.F3 U4.11
ADC_MUX2: U1.F2 U4.14
ADC_MUX3: U1.H1 U4.13
ADC_SENSE_HI: R17.2 R21.2 U1.H3
ADC_SENSE_LO: C22.2 R22.2 U1.G3
AREF: C23.2 U4.2
ECP5_VREF: C1.2 C2.2 C3.2 C4.2 C5.2 C6.2 C11.2 C12.2 R5.1 R6.2 U1.B4 U1.C15 U1.H15 U3.H1 U3.M8
EN: R37.1 R45.1 R48.1 U6.5 U7.5 U8.5 U9.3
EXT_PLL_N: U1.M17
EXT_PLL_P: U1.M16
FPGA_RESET: J4.1 R3.2 U1.T15 U1.V17
GND: C1.1 C2.1 C3.1 C4.1 C5.1 C6.1 C7.1 C8.1 C9.1 C10.1 C11.1 C12.1 C13.1 C14.1 C15.1 C16.1 C17.1 C18.1 C19.1 C20.1 C21.1 C22.1 C23.1 C24.1 C25.1 C26.1 C27.2 C28.2 C29.2 C30.1 C32.1 C33.1 C34.1 C36.1 C37.1 C38.1 C39.1 C40.1 C41.1 C42.1 C43.1 C44.1 C45.1 C46.1 C47.1 C48.1 C49.1 C50.1 C51.1 C52.1 C53.1 C54.1 C55.1 C56.1 C57.1 C58.1 C59.1 C60.1 C62.1 C63.1 C64.1 C65.1 C66.2 C67.2 J1.2 J1.3 J3.A1 J3.A12 J3.B1 J3.B12 J3.S1 J3.S2 J3.S3 J3.S4 J5.6 J5.11 J5.12 J6.1 J6.MP1 J6.MP2 R4.2 R6.1 R9.1 R13.1 R15.1 R16.1 R21.1 R39.1 R40.1 R41.1 R42.1 R43.1 R44.1 R47.1 R50.1 SW1.1 SW1.2 U1.B3 U1.B16 U1.E5 U1.E7 U1.E8 U1.E9 U1.E10 U1.E11 U1.E12 U1.E14 U1.F5 U1.F6 U1.F7 U1.F8 U1.F9 U1.F10 U1.F11 U1.F12 U1.F13 U1.F14 U1.G2 U1.G6 U1.G7 U1.G8 U1.G9 U1.G10 U1.G11 U1.G12 U1.G13 U1.G17 U1.H6 U1.H7 U1.H8 U1.H9 U1.H10 U1.H11 U1.H12 U1.H13 U1.J6 U1.J7 U1.J8 U1.J9 U1.J10 U1.J11 U1.J12 U1.J13 U1.K5 U1.K6 U1.K7 U1.K8 U1.K9 U1.K10 U1.K11 U1.K12 U1.K13 U1.K14 U1.L2 U1.L5 U1.L6 U1.L7 U1.L8 U1.L9 U1.L10 U1.L11 U1.L12 U1.L13 U1.L14 U1.L15 U1.L16 U1.L17 U1.M6 U1.M7 U1.M8 U1.M9 U1.M10 U1.M11 U1.M12 U1.M13 U1.N7 U1.N8 U1.N9 U1.N10 U1.N11 U1.N12 U1.P5 U1.P6 U1.P8 U1.P10 U1.P12 U1.R1 U1.R2 U1.R3 U1.R10 U1.T1 U1.T2 U1.T3 U1.T4 U1.T5 U1.T6 U1.T7 U1.T8 U1.T9 U1.T10 U1.T11 U1.T12 U1.T16 U1.U1 U1.U2 U1.U3 U1.U4 U1.U5 U1.U6 U1.U7 U1.U8 U1.U9 U1.U10 U1.U11 U1.U12 U1.U14 U1.V4 U1.V5 U1.V6 U1.V7 U1.V8 U1.V9 U1.V10 U1.V15 U2.4 U3.A9 U3.B1 U3.B3 U3.B9 U3.D1 U3.D8 U3.E1 U3.E2 U3.E8 U3.F9 U3.G1 U3.G8 U3.G9 U3.J2 U3.J8 U3.M1 U3.M9 U3.P1 U3.P9 U3.T1 U3.T9 U4.9 U4.12 U4.20 U4.21 U4.22 U5.4 U5.6 U5.8 U5.17 U6.2 U7.2 U8.2 U9.2 Y1.2
IO_0: U1.N17
IO_1: U1.M18
IO_5: U1.B10
IO_6: U1.B9
IO_9: U1.C8
IO_10: U1.B8
IO_11: U1.A8
IO_12: U1.H2
IO_13: U1.J2
IO_A0: R18.1 U1.L4
IO_A1: R23.1 U1.N3
IO_A2: R19.1 U1.N4
IO_A3: R24.1 U1.H4
IO_A4: R20.1 U1.G4
IO_A5: R25.1 U1.T17
IO_MISO: U1.N15
IO_MOSI: U1.N16
IO_SCK: U1.R17
IO_SCL: U1.C9
IO_SDA: U1.C10
JTAG_TCK: J1.9 R4.1 U1.U13
JTAG_TDI: J1.7 U1.T13
JTAG_TDO: J1.8 U1.V14
JTAG_TMS: J1.10 U1.V13
LED_B: R29.2 U1.J3
LED_G: R27.2 U1.M3
LED_R: R26.2 U1.K4
N_RESET: J1.6
NetC17_2: C17.2 R7.2 R8.2
NetC24_2: C24.2 C25.2 FB3.2 J5.4
NetC31_1: C31.1 R38.1 R39.2 U6.1
NetC35_1: C35.1 R46.1 R47.2 U7.1
NetC61_1: C61.1 R49.1 R50.2 U8.1
NetD1_4: D1.4 R27.1
NetD1_5: D1.5 R29.1
NetD1_6: D1.6 R26.1
NetD2_2: D2.2 R36.1
NetD2_3: D2.3 R35.1
NetJ3_A5: J3.A5 R16.2
NetJ3_B5: J3.B5 R15.2
NetL1_1: L1.1 U6.4
NetL2_1: L2.1 U7.4
NetL3_1: L3.1 U8.4
NetR9_2: R9.2 U3.L8
NetR10_1: R10.1 R13.2 U4.16
NetR17_1: R17.1 U4.1
NetR35_2: R35.2 U5.9
NetR36_2: R36.2 U5.7
NetR40_2: R40.2 U5.1
NetR41_2: R41.2 U5.12
NetR42_2: R42.2 U5.15
NetR43_2: R43.2 U5.16
NetR44_2: R44.2 U5.14
P1.1V: C31.2 C32.2 C33.2 C38.2 C39.2 C40.2 C41.2 C42.2 C43.2 C44.2 C45.2 C46.2 C47.2 L1.2 R38.2 U1.D8 U1.D9 U1.D10 U1.D11 U1.J4 U1.J5 U1.J14 U1.J15 U1.M4 U1.M15 U1.P7 U1.P9 U1.P11 U4.17
P1.35V: C35.2 C36.2 C37.2 FB1.1 FB2.1 L2.2 R5.2 R28.2 R46.2 U1.B18 U1.C6 U1.D17 U1.G5 U1.G14 U1.H5 U1.H14 U1.K15 U1.K16 U1.K17 U1.M14 U1.N14 U4.19
P2.5V: C50.2 C51.2 C52.2 C53.2 C54.2 C55.2 C56.2 C57.2 C67.1 U1.E6 U1.E13 U1.N6 U1.P13 U4.18 U9.1
P3.3V: C48.2 C49.2 C58.2 C59.2 C61.2 C62.2 C63.2 C64.2 C65.2 C66.1 D1.1 D1.2 D1.3 FB3.1 J1.1 L3.2 R1.2 R2.2 R3.1 R30.2 R31.2 R32.2 R33.2 R34.2 R49.2 U1.D7 U1.D12 U1.M5 U1.N5 U1.N13 U1.P14 U1.T14 U2.8 U4.23 U4.24 U9.4 Y1.1 Y1.4
PUSB_VBUS: C27.1 J3.A4 J3.A9 J3.B4 J3.B9 U5.13
QSPI_D2: U1.R18 U2.3
QSPI_D3: U1.N18 U2.7
RAM_A0: U1.C4 U3.N3
RAM_A1: U1.D2 U3.P7
RAM_A2: U1.D3 U3.P3
RAM_A3: U1.A3 U3.N2
RAM_A4: U1.A4 U3.P8
RAM_A5: U1.D4 U3.P2
RAM_A6: U1.C3 U3.R8
RAM_A7: U1.B2 U3.R2
RAM_A8: U1.B1 U3.T8
RAM_A9: U1.D1 U3.R3
RAM_A10: U1.A7 U3.L7
RAM_A11: U1.C2 U3.R7
RAM_A12: U1.B6 U3.N7
RAM_A13: U1.C1 U3.T3
RAM_A14: U1.A2 U3.T7
RAM_A15: U1.C7 U3.M7
RAM_BA0: U1.D6 U3.M2
RAM_BA1: U1.B7 U3.N8
RAM_BA2: U1.A6 U3.M3
RAM_CAS#: U1.D13 U3.K3
RAM_CK_N: R8.1 U1.K18 U3.K7
RAM_CK_P: R7.1 U1.J18 U3.J7
RAM_CKE: U1.D18 U3.K9
RAM_CS#: U1.A12 U3.L2
RAM_D0: U1.C17 U3.E3
RAM_D1: U1.D15 U3.F7
RAM_D2: U1.B17 U3.F2
RAM_D3: U1.C16 U3.F8
RAM_D4: U1.A15 U3.H3
RAM_D5: U1.B13 U3.H8
RAM_D6: U1.A17 U3.G2
RAM_D7: U1.A13 U3.H7
RAM_D8: U1.F17 U3.D7
RAM_D9: U1.F16 U3.C3
RAM_D10: U1.G15 U3.C8
RAM_D11: U1.F15 U3.C2
RAM_D12: U1.J16 U3.A7
RAM_D13: U1.C18 U3.A2
RAM_D14: U1.H16 U3.B8
RAM_D15: U1.F18 U3.A3
RAM_LDM: U1.G16 U3.E7
RAM_LDQS_N: U1.H17 U3.B7
RAM_LDQS_P: U1.G18 U3.C7
RAM_ODT: U1.C13 U3.K1
RAM_RAS#: U1.C12 U3.J3
RAM_RESET#: U1.L18 U3.T2
RAM_UDM: U1.D16 U3.D3
RAM_UDQS_N: U1.A16 U3.G3
RAM_UDQS_P: U1.B15 U3.F3
RAM_VDD: C7.2 C8.2 C9.2 C10.2 C18.2 C19.2 FB1.2 U3.B2 U3.D9 U3.G7 U3.K2 U3.K8 U3.N1 U3.N9 U3.R1 U3.R9
RAM_VDDQ: C13.2 C14.2 C15.2 C16.2 C20.2 C21.2 FB2.2 U3.A1 U3.A8 U3.C1 U3.C9 U3.D2 U3.E9 U3.F1 U3.H2 U3.H9
RAM_WE#: U1.B12 U3.L3
REF_CLK: U1.A9 Y1.3
SD0_CD: J5.9 R34.1 U1.L1
SD0_CLK: J5.5 U1.K1
SD0_CMD: J5.3 R32.1 U1.K2
SD0_DAT0: J5.7 R31.1 U1.J1
SD0_DAT1: J5.8 R30.1 U1.K3
SD0_DAT2: J5.1 R33.1 U1.L3
SD0_DAT3: J5.2 U1.M1
SPI_CONFIG_MISO: U1.T18 U2.2
SPI_CONFIG_MOSI: U1.U18 U2.5
SPI_CONFIG_SCK: R2.1 U1.U16 U2.6
SPI_CONFIG_SS: R1.1 U1.U17 U2.1
USB_D_N: R14.1 U1.M2
USB_D_P: R11.2 R12.1 U1.N1
USB_PULLUP: R11.1 U1.N2
USER_BUTTON: C26.2 R28.1 SW1.3 SW1.4 U1.J17
VBATT: C29.1 J2.1 J6.2 R10.2 U5.2 U5.3
VSYS: C28.1 C30.2 C34.2 C60.2 D2.4 D2.5 D2.6 R37.2 R45.2 R48.2 U5.5 U5.10 U5.11 U6.3 U7.3 U8.3
pads on no net: D2.1 J1.4 J1.5 J2.2 J2.3 J2.4 J2.5 J2.6 J2.7 J2.8 J2.9 J2.10 J2.11 J2.12 J3. J3.A8 J3.B8 J4.2 J4.3 J4.4 J4.5 J4.6 J4.7 J4.8 J4.9 J4.10 J4.11 J4.12 J4.13 J4.14 J4.15 J4.16 J5.10 J5.13 J5.14 U1.A10 U1.A11 U1.B11 U1.C11 U1.H18 U1.R16 U1.U15 U1.V2 U1.V3 U1.V11 U1.V12 U1.V16 U2.9 U3.J1 U3.J9 U3.L1 U3.L9 U4.10 U4.25 U6.6 U7.6 U8.6 U9.5

## Silkscreen, mask and mechanical layers (free items; w line width, h text height)
Mechanical 1:
  the board outline again, w10

## Text inside footprints (layer, text, board x,y; h text height)
J3: Mechanical 13 "PCB Edge" at 13510.16,9061.5 h27.56 r270